# Altium PCB Attn_Bits.PcbDoc
Units mm, origin at the board's own origin, x right, y up, seen from the top; angles counter-clockwise.
Board outline 65.02 x 25.02 mm, 2 copper layers (Top Layer, Bottom Layer); 33 components, 24 nets, 119 pads, 31 vias.
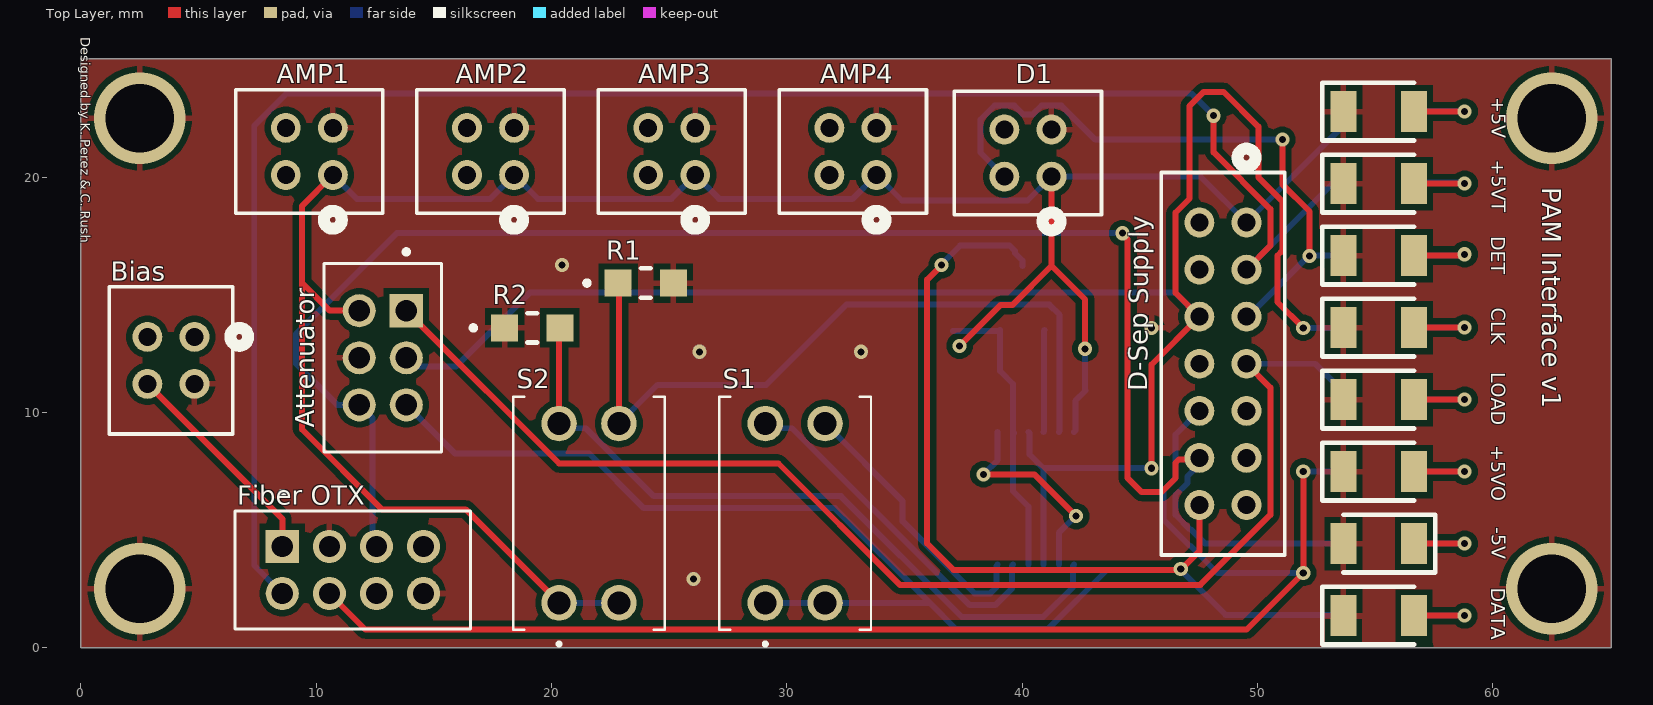
[diagram p0: Top Layer view]
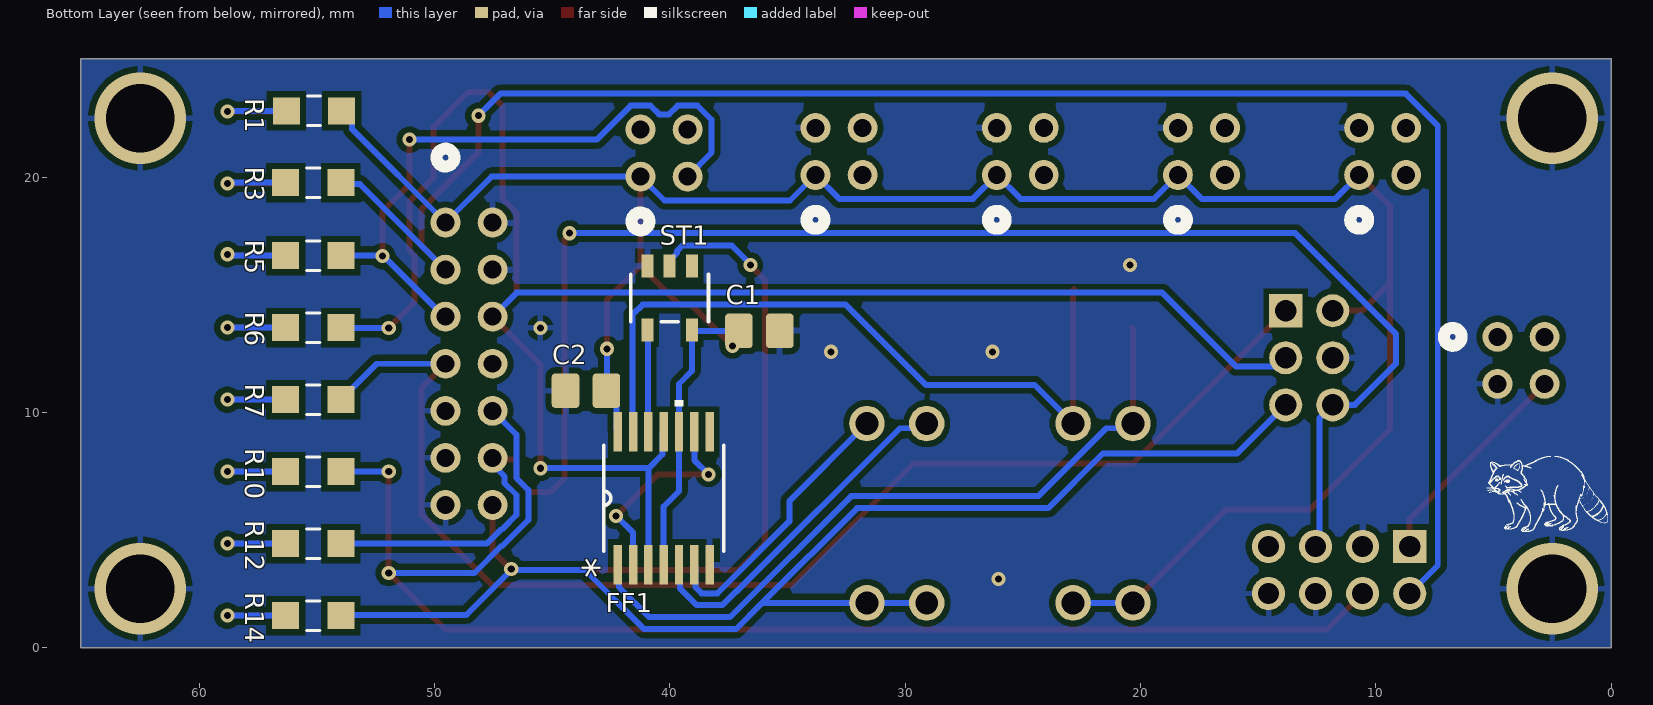
[diagram p1: Bottom Layer view, seen from below]

## Layer stack, top to bottom
Top Solder: solder mask 0.0102, Solder Resist, Dk 3.5
Top Layer: signal copper 0.0356
Dielectric 1: dielectric 0.32, FR-4, Dk 4.8
Bottom Layer: signal copper 0.0356
Bottom Solder: solder mask 0.0102, Solder Resist, Dk 3.5

## Board outline
0,0 0,25.019 65.024,25.019 65.024,0

## Design rules (kind name [scope] priority, off if disabled: settings)
Clearance [All] p1: gap=0.254 ignorepadtopadclearanceinfootprint=FALSE
ComponentClearance [All] p1: gap=0.1 collisioncheckmode=3 verticalgap=0.254 showdistances=FALSE checkcomponentboundary=TRUE
PolygonConnect [All] p1: connectstyle=Relief reliefconductorwidth=0.254 reliefentries=4 polygonreliefangle="90 Angle" airgapwidth=0.254
RoutingVias [All] p1: holewidth=0.711 width=1.27 viastyle="Through Hole" minholewidth=0.711 minwidth=1.27 maxholewidth=0.711 maxwidth=1.27
SolderMaskExpansion [All] p1: expansion=0.102 istentingtop=FALSE
SupplyNets "Schematic Supply Nets_9" [InNet('DET')] p1: voltage=0.000
SupplyNets "Schematic Supply Nets_8" [InNet('+5VO')] p2: voltage=0.000
SupplyNets "Schematic Supply Nets_6" [InNet('DATA')] p3: voltage=0.000
SupplyNets "Schematic Supply Nets_5" [InNet('+5VT')] p4: voltage=0.000
SupplyNets "Schematic Supply Nets_4" [InNet('CLK')] p5: voltage=0.000
SupplyNets "Schematic Supply Nets_3" [InNet('LOAD')] p6: voltage=0.000
SupplyNets "Schematic Supply Nets_2" [InNet('-5V')] p7: voltage=0.000
SupplyNets "Schematic Supply Nets_1" [InNet('+5V')] p8: voltage=0.000
SupplyNets "Schematic Supply Nets" [InNet('GND')] p9: voltage=0.000
Width [All] p1: maxlimit=0.254 minlimit=0.254 preferedwidth=0.254
29 further rules are at their usual default settings.

## Classes and differential pairs
component class Sheet1: +5VO +5VT -5V Attenuator Bias C1 C2 CLK "D-Sep Supply" DATA DET FF1 "Fiber OTX" LOAD R1 R2 R3 R4 R5 R6 R7 R8 R9 R10 R11 R12 R13 R14 S1 S2 ST1

## Components (designator, comment, footprint, x,y, rotation, side; value= is the part's Value field where it differs from the comment)
+5V "SML-LX1206GW-TR" LEDC3216X110N 55.151,22.781 r0 top (schematic designator LED1)
+5VO "SML-LX1206GW-TR" LEDC3216X110N 55.151,7.481 r0 top
+5VT "SML-LX1206GW-TR" LEDC3216X110N 55.151,19.721 r0 top
-5V "SML-LX1206GW-TR" LEDC3216X110N 55.151,4.421 r180 top
AMP1 "DF11-4DP-2DSA(24)" CON4_2X2_UF_DF11_HIR 10.707,20.087 r0 top (schematic designator U4)
AMP2 "DF11-4DP-2DSA(24)" CON4_2X2_UF_DF11_HIR 18.407,20.087 r0 top (schematic designator U3)
AMP3 "DF11-4DP-2DSA(24)" CON4_2X2_UF_DF11_HIR 26.107,20.087 r0 top (schematic designator U2)
AMP4 "DF11-4DP-2DSA(24)" CON4_2X2_UF_DF11_HIR 33.807,20.087 r0 top (schematic designator U1)
Attenuator "DF11-6DP-2DSA(24)" HIROSE_DF11-6DP-2DSA(24) 12.827,12.319 r90 top
Bias "DF11-4DP-2DSA(24)" CON4_2X2_UF_DF11_HIR 4.826,13.208 r90 top
C1 "VJ0805Y104KXQCW1BC" CAPC2012X145N#1 36.195,13.462 r0 bottom value="0.1 uF"
C2 "VJ0805Y104KXQCW1BC" CAPC2012X145N#2 43.561,10.922 r0 top value="0.1 uF"
CLK "SML-LX1206GW-TR" LEDC3216X110N 55.151,13.601 r0 top
D1 "DF11-4DP-2DSA(24)" CON4_2X2_UF_DF11_HIR 41.243,20.018 r0 top (schematic designator "Power Detector Module")
"D-Sep Supply" "DF11-14DP-2DSA(24)" CON14_2X7_UF_DF11_HIR 49.53,18.065 r90 top
DATA "SML-LX1206GW-TR" LEDC3216X110N 55.151,1.361 r0 top
DET "SML-LX1206GW-TR" LEDC3216X110N 55.151,16.661 r0 top
FF1 "SN74ACT74PWRQ1" PW14 40.259,6.35 r90 bottom (schematic designator "dual Flip Flop 1")
"Fiber OTX" "DF11-8DP-2DSA(24)" HIROSE_DF11-8DP-2DSA(24) 11.557,3.302 r180 top
LOAD "SML-LX1206GW-TR" LEDC3216X110N 55.151,10.541 r0 top
R1 "ERA6VEB1000V" RES_ERA6VEB1000V 55.118,22.812 r0 bottom
R1 "ERA6AEB1071V" ERA6AEB101V 24.003,15.494 r0 top (schematic designator "1k R1")
R2 "ERA6AEB1071V" ERA6AEB101V 19.177,13.589 r0 top (schematic designator "1k R2")
R3 "ERA6VEB1000V" RES_ERA6VEB1000V 55.151,19.764 r180 bottom
R5 "ERA6VEB1000V" RES_ERA6VEB1000V 55.151,16.661 r0 bottom
R6 "ERA6VEB1000V" RES_ERA6VEB1000V 55.151,13.601 r180 bottom
R7 "ERA6VEB1000V" RES_ERA6VEB1000V 55.151,10.541 r180 bottom
R10 "ERA6VEB1000V" RES_ERA6VEB1000V 55.151,7.481 r0 bottom
R12 "ERA6VEB1000V" RES_ERA6VEB1000V 55.151,4.421 r0 bottom
R14 "ERA6VEB1000V" RES_ERA6VEB1000V 55.151,1.361 r180 bottom
S1 "NDS-02V" NDS02V 29.083,1.905 r0 top
S2 "NDS-02V" NDS02V 20.32,1.905 r0 top
ST1 "SN74LVC1G17DBVR" DBV5 40.005,14.859 r270 bottom (schematic designator Schmitt-Trigger)

## Footprints (in the part's own frame and the unit in brackets; to place one, negate y for a bottom-side part, rotate by r counter-clockwise, add the part's x,y. Pads: shape width x height; smd on the part's side, far side on the other; paste and mask are expansions set on the pad)
CAPC2012X145N#1 [mm]
  rrect25% 1.17x1.47 smd paste+0 mask+0.102: 1(-0.87,0) 2(0.87,0)
CAPC2012X145N#2 [mm]
  rrect25% 1.17x1.47 smd far side paste+0 mask+0.102: 1(-0.87,0) 2(0.87,0)
CON4_2X2_UF_DF11_HIR [mm]
  round 1.27 hole 0.762 paste-2539.97 mask+0.102: 1(0,0) 2(0,2) 3(-2,0) 4(-2,2)
  silkscreen extent -4.13,-2.29 2.13,3.63
CON14_2X7_UF_DF11_HIR [mm]
  round 1.27 hole 0.762 paste-2539.97 mask+0.102: 1(0,0) 2(0,2) 3(-2,0) 4(-2,2) 5(-4,0) 6(-4,2) 7(-6,0) 8(-6,2) 9(-8,0) 10(-8,2) 11(-10,0) 12(-10,2) 13(-12,0) 14(-12,2)
  silkscreen extent -14.13,-1.63 3.14,3.63
DBV5 [mil]
  rect 38.28x20 smd paste+0 mask+0: 1(-53.64,37.4) 2(-53.64,0) 3(-53.64,-37.4) 4(53.64,-37.4) 5(53.64,37.4)
  silkscreen extent -40,-65 40,65, body extent -59,-60 59,60, height 57
ERA6AEB101V [mm]
  rect 1.15x1.15 smd: 1(-1.175,0) 2(1.175,0)
  silkscreen extent -2.6,-0.63 0.2,0.63
HIROSE_DF11-6DP-2DSA(24) [mm]
  rect 1.408x1.408 / inner round 1.408 / far side rect 1.408x1.408 hole 0.9: 1(2,-1)
  round 1.408 hole 0.9: 2(2,1) 3(0,-1) 4(0,1) 5(-2,-1) 6(-2,1)
  silkscreen extent -4,-2.5 4.6,2.5
HIROSE_DF11-8DP-2DSA(24) [mm]
  rect 1.408x1.408 / inner round 1.408 / far side rect 1.408x1.408 hole 0.9: 1(3,-1)
  round 1.408 hole 0.9: 2(3,1) 3(1,-1) 4(1,1) 5(-1,-1) 6(-1,1) 7(-3,-1) 8(-3,1)
  silkscreen extent -5,-3.35 5,2.5
LEDC3216X110N [mm]
  rect 1.1x1.75 smd: 1(-1.5,0) 2(1.5,0)
  silkscreen extent -2.4,-1.22 1.5,1.22
NDS02V [mm]
  round 1.509 hole 0.97: 1(0,0) 2(2.54,0) 3(2.54,7.62) 4(0,7.62)
  silkscreen extent -1.95,-1.8 4.49,8.76
PW14 [mil]
  rect 66x14 smd paste-33 mask-33: 1(-111,76.77) 2(-111,51.18) 3(-111,25.59) 4(-111,0) 5(-111,-25.59) 6(-111,-51.18) 7(-111,-76.77) 8(111,-76.77) 9(111,-51.18) 10(111,-25.59) 11(111,0) 12(111,25.59) 13(111,51.18) 14(111,76.77)
  silkscreen extent -88,-100 164,100, body extent -130,-101 130,101, height 47
RES_ERA6VEB1000V [mm]
  rect 1.15x1.15 smd: 1(-1.175,0) 2(1.175,0)
  silkscreen extent -0.28,-0.63 0.28,0.63

## Part data
+5V +5VO +5VT -5V CLK DATA DET LOAD: "LUMEX - SML-LX1206GW-TR - LED, 2MM X 1.6MM, GREEN, 10MCD, 565NM", Manufacturer_Name=Lumex, Mouser Part Number=696-SML-LX1206GW, Arrow Part Number=SML-LX1206GW-TR, Arrow Price/Stock=https://www.arrow.com/en/products/sml-lx1206gw-tr/lumex?region=nac, Datasheet Link=https://datasheet.datasheetarchive.com/originals/distributors/Datasheets-315/519820.pdf, Geometry.Height=1.1mm, Manufacturer_Part_Number=SML-LX1206GW-TR, Mouser Price/Stock=https://www.mouser.co.uk/ProductDetail/Lumex/SML-LX1206GW-TR?qs=k7wqd3tv8MigBobUZMRxZw%3D%3D
AMP1 AMP2 AMP3 AMP4 Bias D1: library part DF11-4DP-2DSA24, "No Description Available", Manufacturer_Name=Hirose, Copyright="Copyright (C) 2025 Ultra Librarian. All rights reserved.", Manufacturer_Part_Number=DF11-4DP-2DSA(24), RefDes=RefDes, Type=Type
Attenuator: "Connector Header Through Hole 6 position 0.079 (2.00mm)", Package=None, Check_prices=https://www.snapeda.com/parts/DF11-6DP-2DSA(24)/Hirose+Electric+Co+Ltd/view-part/?ref=eda, MF="Hirose Electric Co Ltd", MP=DF11-6DP-2DSA(24), SnapEDA_Link=https://www.snapeda.com/parts/DF11-6DP-2DSA(24)/Hirose+Electric+Co+Ltd/view-part/?ref=snap
C1 C2 R1 R3 R5 R6 R7 R10 R12 R14: Package=None, Availability=Unavailable, Price=None
  C1 C2: MF="{'manufacturer': u'Vishay Vitramon'}", MP=VJ0805Y104KXQCW1BC
  R1 R3 R5 R6 R7 R10 R12 R14: MP=ERA6VEB1000V
"D-Sep Supply": library part DF11-14DP-2DSA24, "No Description Available", Manufacturer_Name=Hirose, Copyright="Copyright (C) 2025 Ultra Librarian. All rights reserved.", Manufacturer_Part_Number=DF11-14DP-2DSA(24), RefDes=RefDes, Type=Type
FF1: library part SN74ACT74PWR, "Dual Positive-Edge-Triggered D-Type Flip-Flops With Clear and Preset 14-TSSOP -40 to 125", Manufacturer_Name="Texas Instruments", Copyright="Copyright (C) 2025 Ultra Librarian. All rights reserved.", Datasheet=https://www.ti.com/lit/gpn/sn74act74, Manufacturer_Part_Number=SN74ACT74PWR, RefDes=RefDes, Type=Type
"Fiber OTX": "Connector Header Through Hole 8 position 0.079 (2.00mm)", Package=None, Check_prices=https://www.snapeda.com/parts/DF11-8DP-2DSA(24)/Hirose/view-part/?ref=eda, MF="Hirose Electric", MP=DF11-8DP-2DSA(24), SnapEDA_Link=https://www.snapeda.com/parts/DF11-8DP-2DSA(24)/Hirose/view-part/?ref=snap
R1 R2: "Panasonic ERA Series Thin Film Surface Mount Resistor 0805 Case 1.07k +/-0.1% 0.125W +/-25ppm/C", Manufacturer_Name=Panasonic, Arrow Part Number=ERA6AEB1071V, Arrow Price/Stock=https://www.arrow.com/en/products/era-6aeb1071v/panasonic?utm_currency=USD&region=nac, Datasheet Link=https://industrial.panasonic.com/cdbs/www-data/pdf/RDM0000/AOA0000C307.pdf, Geometry.Height=0.6mm, Manufacturer_Part_Number=ERA6AEB1071V
S1 S2: "DIP Switches / SIP Switches Dip switch Slide Type", Manufacturer_Name=Diptronics, Mouser Part Number=113-NDS-02V, Datasheet Link=https://www.mouser.com/datasheet/2/910/DS_1-1571341.pdf, Geometry.Height=7.05mm, Manufacturer_Part_Number=NDS-02V, Mouser Price/Stock=https://www.mouser.co.uk/ProductDetail/Diptronics/NDS-02V?qs=gTYE2QTfZfRxLXvySsrtvg%3D%3D
ST1: "Single 1.65-V to 5.5-V buffer with Schmitt-Trigger inputs 5-SOT-23 -40 to 125", Manufacturer_Name="Texas Instruments", Copyright="Copyright (C) 2025 Ultra Librarian. All rights reserved.", Manufacturer_Part_Number=SN74LVC1G17DBVR, RefDes=RefDes, Type=Type

## Via types
v1: diameter 0.6, hole 0.3, Top Layer to Bottom Layer, 27 vias
v2: diameter 3.9, hole 2.9, Top Layer to Bottom Layer, 4 vias

## Nets (pads, with @x,y where several pads share a name; then routed paths per layer and width w, separated by ;. In a path a pad name is that pad's centre, name@x,y a point inside that pad or via, vN(x,y) a via of type N, cw(c..) or ccw(c..) an arc to the next point about the centre after c; other vN are vias at no path point)
+5V: "D-Sep Supply.1" AMP1.1 AMP2.1 AMP3.1 AMP4.1 Attenuator.2 C1.2 C2.1 D1.1 FF1.4 FF1.10 FF1.14 R1.1@53.943,22.812 S2.1 S2.2 ST1.5 | length 109.8
  Top Layer w0.254: AMP1.1 9.398,18.778 9.398,15.494 ; Attenuator.2 10.573,14.319 9.398,15.494 ; S2.1 16.346,5.879 12.79,5.879 9.398,9.271 9.398,15.494 ; v1(37.338,12.827) 39.07,14.559 39.578,14.559 41.243,16.224 ; D1.1 41.243,16.224 ; v1(42.672,12.7) 42.672,14.795 41.243,16.224
  Bottom Layer w0.254: AMP1.1 11.723,19.071 17.391,19.071 AMP2.1 19.423,19.071 25.091,19.071 AMP3.1 27.123,19.071 32.791,19.071 AMP4.1 34.892,19.002 40.227,19.002 D1.1 47.577,20.018 49.53,18.065 53.495,22.03 53.495,22.364 R1.1@53.943,22.812 ; S2.1 S2.2 ; C1.2 39.02,13.462 ST1.5 39.055,11.761 39.609,11.207 FF1.10 FF1.10@39.66,9.119 ; FF1.10@39.609,9.119 39.609,6.65 40.259,6 FF1.4 ; FF1.14 42.26,9.22 42.26,10.491 C2.1 42.672,10.941 v1(42.672,12.7)
+5VO: "D-Sep Supply.10" "Fiber OTX.4" R10.1 | length 61.5
  Top Layer w0.254: 10.557,2.302 12.089,0.77 49.538,0.77 v1(51.943,3.175) v1(51.943,7.493)
  Bottom Layer w0.254: 47.53,10.065 46.514,9.049 46.514,7.204 46.006,6.696 46.006,5.434 47.122,4.318 47.157,4.318 48.3,3.175 v1(51.943,3.175) ; v1@51.955,7.481 R10.1
+5VT: "D-Sep Supply.3" "Fiber OTX.2" R3.2 | length 76
  Top Layer w0.254: v1(48.133,22.606) 48.133,21.05 50.546,18.637 50.546,17.081 49.53,16.065
  Bottom Layer w0.254: 8.557,2.302 7.366,3.493 7.366,22.183 8.725,23.542 47.197,23.542 v1(48.133,22.606) ; 49.53,16.065 53.169,19.704 53.916,19.704 R3.2
-5V: "D-Sep Supply.12" "Fiber OTX.5" Attenuator.6 R12.1 | length 73.5
  Top Layer w0.254: v1@44.245,17.604 44.482,17.367 44.482,7.204 45.077,6.609 45.919,6.609 46.514,7.204 46.514,7.855 46.663,8.003 47.468,8.003 47.53,8.065
  Bottom Layer w0.254: 12.557,4.302 12.383,4.477 12.383,9.763 Attenuator.6 10.89,10.319 9.144,12.065 9.144,13.335 13.421,17.612 v1(44.254,17.612) ; 47.53,8.065 47.53,7.79 47.022,7.282 47.022,6.994 46.514,6.486 46.514,5.644 47.126,5.033 47.161,5.033 47.772,4.421 R12.1
CLK: "D-Sep Supply.6" Attenuator.3 FF1.3 FF1.11 R6.2 | length 78.3
  Top Layer w0.254: v1(45.498,7.625) 45.498,12.033 47.53,14.065 46.514,15.081 46.514,18.486 47.117,19.089 47.117,23.027 47.712,23.622 48.554,23.622 50.038,22.138 50.038,19.99 51.054,18.974 51.054,16.871 50.85,16.666 50.85,14.682 v1(51.943,13.589)
  Bottom Layer w0.254: Attenuator.3 14.208,11.938 15.932,11.938 19.08,15.086 46.509,15.086 47.53,14.065 ; FF1.11 40.31,9.119 40.31,8.214 40.898,7.625 ; FF1.3 40.898,3.541 40.898,7.625 ; v1(45.498,7.625) 40.898,7.625 ; v1(51.943,13.589) 53.964,13.589 R6.2
DATA: "D-Sep Supply.14" Attenuator.5 R14.2 S1.1 S1.2 ST1.2 | length 83.7
  Top Layer w0.254: v1(36.576,16.256) 35.961,15.641 35.961,4.425 37.084,3.302 46.69,3.302 v1(46.736,3.348) ; v1@46.759,3.325 47.53,4.096 47.53,6.065
  Bottom Layer w0.254: Attenuator.5 15.891,8.255 21.59,8.255 23.914,5.931 32.042,5.931 36.068,1.905 ; S1.1 S1.2 36.068,1.905 ; v1(36.576,16.256) 36.576,16.305 37.36,17.089 39.467,17.089 39.69,16.865 39.69,16.769 40.005,16.454 ST1.2 ; v1@46.736,3.302 48.641,1.397 53.94,1.397 R14.2 ; v1(46.736,3.348) 46.69,3.302 43.604,3.302 41.089,0.787 37.186,0.787 36.068,1.905
DET: "D-Sep Supply.5" D1.3 R5.1 | length 27.8
  Top Layer w0.254: v1(51.054,21.59) 51.054,19.692 52.212,18.534 v1(52.212,16.637)
  Bottom Layer w0.254: D1.3 38.227,21.034 38.227,21.597 38.227,22.439 38.822,23.034 39.664,23.034 40.033,22.665 40.453,22.665 40.822,23.034 41.664,23.034 43.108,21.59 v1(51.054,21.59) ; 49.53,14.065 49.585,14.065 52.157,16.637 v1(52.212,16.637) 52.236,16.661 R5.1
GND: "D-Sep Supply.2" "D-Sep Supply.4" "D-Sep Supply.9" "D-Sep Supply.11" "D-Sep Supply.13" "Fiber OTX.3" "Fiber OTX.6" "Fiber OTX.8" +5V.1 +5VO.1 +5VT.1 -5V.2 AMP1.2 AMP2.2 AMP3.2 AMP4.2 Attenuator.4 Bias.3 C1.1 C2.2 CLK.1 D1.2 DATA.1 DET.1 FF1.7 LOAD.1 R1.2@25.178,15.494 R2.1 ST1.3
  other v1: 26.035,2.921 26.289,12.573 33.147,12.573 45.498,13.589 20.447,16.256
  other v2: 2.5,2.5 62.5,2.5 2.5,22.5 62.5,22.5
LOAD: "D-Sep Supply.7" Attenuator.1 R7.2 | length 54.2
  Top Layer w0.254: Attenuator.1@14.208,13.938 20.322,7.824 29.642,7.824 34.798,2.667 47.569,2.667 50.546,5.644 50.546,11.049 49.53,12.065
  Bottom Layer w0.254: 49.53,12.065 52.452,12.065 R7.2
"Net1k R1_1": FF1.13 R1.1@22.828,15.494 S2.3 | length 31.7
  Top Layer w0.254: R1.1@22.828,15.24 22.86,15.208 S2.3
  Bottom Layer w0.254: S2.3 24.503,11.168 29.121,11.168 32.53,14.578 41.153,14.578 41.59,14.141 41.59,9.2 FF1.13
"Net1k R2_2": FF1.1 R2.2 S2.4 | length 30.8
  Top Layer w0.254: S2.4 20.32,13.557 R2.2
  Bottom Layer w0.254: S2.4 20.521,9.324 21.455,9.324 24.34,6.439 32.296,6.439 37.44,1.295 40.879,1.295 42.158,2.575 42.158,3.48 FF1.1
Net+5VO_2: +5VO.2 R10.2 | length 4.6
  Top Layer w0.254: +5VO.2 v1(58.801,7.481)
  Bottom Layer w0.254: R10.2 v1(58.801,7.481)
Net+5VT_2: +5VT.2 R3.1 | length 4.6
  Top Layer w0.254: +5VT.2 v1(58.801,19.721)
  Bottom Layer w0.254: R3.1 v1@58.758,19.764
Net-5V_1: -5V.1 R12.2 | length 4.6
  Top Layer w0.254: -5V.1 v1(58.801,4.421)
  Bottom Layer w0.254: R12.2 v1(58.801,4.421)
NetBias_4: "Fiber OTX.1" Bias.4 | length 9.3
  Top Layer w0.254: Bias.4 8.557,5.477 8.557,4.302
NetCLK_2: CLK.2 R6.1 | length 4.6
  Top Layer w0.254: CLK.2 v1(58.801,13.601)
  Bottom Layer w0.254: R6.1 v1(58.801,13.601)
NetDATA_2: DATA.2 R14.1 | length 4.6
  Top Layer w0.254: DATA.2 v1(58.801,1.361)
  Bottom Layer w0.254: R14.1 v1(58.801,1.361)
NetDET_2: DET.2 R5.2 | length 4.5
  Top Layer w0.254: DET.2 v1@58.746,16.661
  Bottom Layer w0.254: R5.2 v1@58.746,16.661
  other v1: 58.801,16.716
"Netdual Flip Flop 1_2": FF1.2 FF1.9 | length 9.1
  Top Layer w0.254: v1(38.354,7.366) 40.513,7.366 v1(42.291,5.588)
  Bottom Layer w0.254: v1(38.354,7.366) 38.959,7.971 FF1.9 ; FF1.2 41.559,4.883 42.264,5.588 v1(42.291,5.588)
"Netdual Flip Flop 1_5": FF1.5 S1.4 | length 15
  Bottom Layer w0.254: S1.4 29.284,9.324 30.218,9.324 37.129,2.413 37.153,2.413 37.763,1.803 38.855,1.803 39.558,2.507 39.558,3.48 FF1.5
"Netdual Flip Flop 1_6": FF1.6 S1.3 | length 11.9
  Bottom Layer w0.254: S1.3 34.918,6.23 34.918,5.367 37.973,2.311 38.645,2.311 38.908,2.575 38.908,3.48 FF1.6
"Netdual Flip Flop 1_12": FF1.12 ST1.4 | length 4.3
  Bottom Layer w0.254: FF1.12 40.932,9.192 40.932,13.474 ST1.4
NetLED1_2: +5V.2 R1.2@56.293,22.812 | length 4.6
  Top Layer w0.254: +5V.2 v1(58.801,22.781)
  Bottom Layer w0.254: R1.2@56.293,22.812 v1@58.77,22.812
NetLOAD_2: LOAD.2 R7.1 | length 4.6
  Top Layer w0.254: LOAD.2 v1(58.801,10.541)
  Bottom Layer w0.254: R7.1 v1(58.801,10.541)
pads on no net: "D-Sep Supply.8" "Fiber OTX.7" AMP1.3 AMP1.4 AMP2.3 AMP2.4 AMP3.3 AMP3.4 AMP4.3 AMP4.4 Bias.1 Bias.2 D1.4 FF1.8 ST1.1

## Polygon pours and split planes (outlines as drawn)
GND on Top Layer "GND_L01_P000" (solid, pour order 0): 0,0 65.024,0 65.024,25.019 0,25.019
GND on Bottom Layer "GND_L02_P004" (solid, pour order 4): 0,0 65.024,0 65.024,25.019 0,25.019

## Silkscreen, mask and mechanical layers (free items; w line width, h text height)
Top Overlay:
  text "Designed by K. Perez & C. Rush" at 0,25.937 h0.4 r270
  text "PAM Interface v1" at 62.103,19.569 h0.8 r270
Bottom Overlay:
  drawing of 78 lines, arcs and shapes, not listed
Board:
  the board outline again, w0.254

## Text inside footprints (layer, text, board x,y; h text height)
FF1: Mechanical 13 "*" at 42.438,2.959 h1.27 r270; Bottom Overlay "*" at 42.438,2.959 h1.27 r270
ST1: Mechanical 13 "*" at 39.639,15.799 h1.27 r90